# Altium PCB 222.PcbDoc
Units mil, origin at the board's own origin, x right, y up, seen from the top; angles counter-clockwise.
Board outline 1929.13 x 275.59 mil, 2 copper layers (Top Layer, Bottom Layer); 16 components, 17 nets, 48 pads, 24 vias.
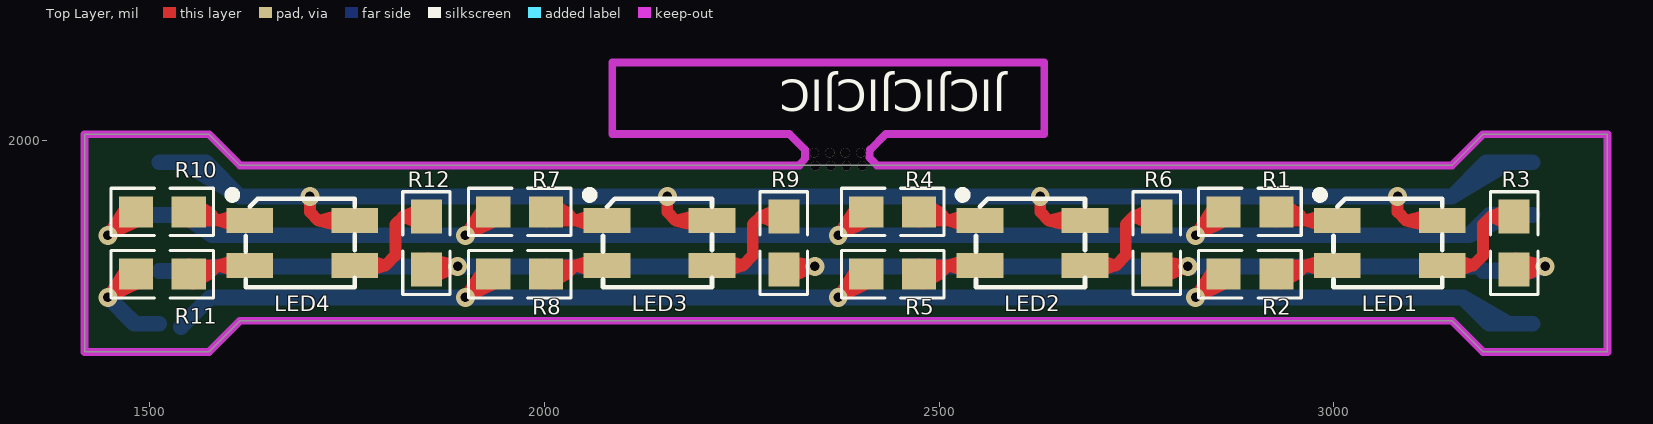
[diagram p0: Top Layer view]
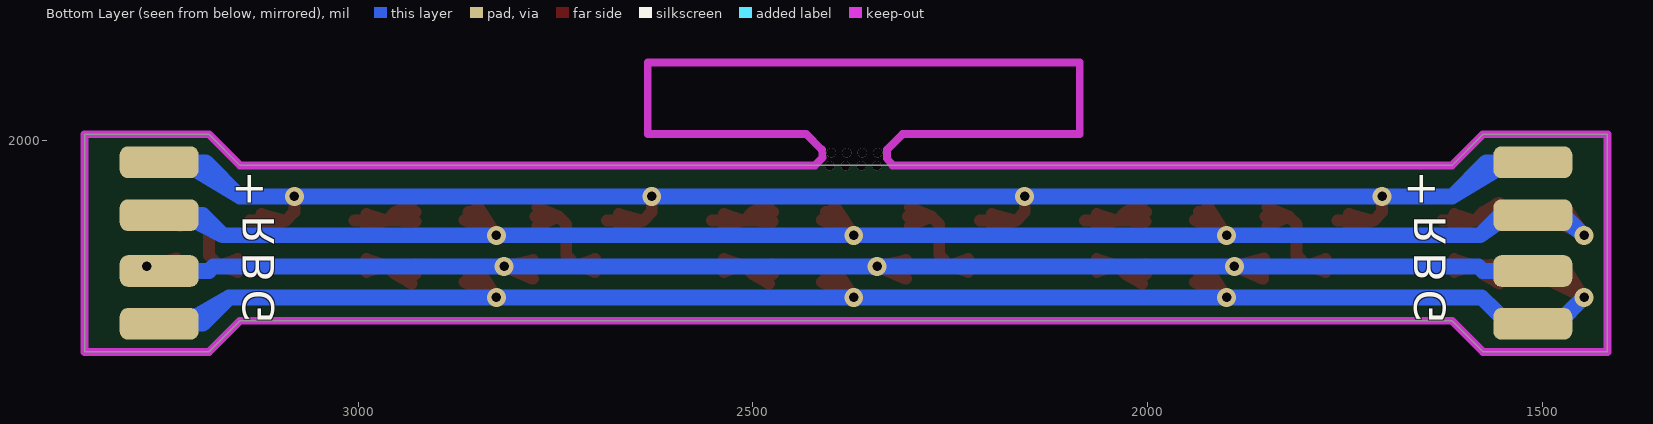
[diagram p1: Bottom Layer view, seen from below]

## Layer stack, top to bottom
Top Layer: signal copper 1.4
Dielectric: dielectric 12.6, FR-4, Dk 4.8
Bottom Layer: signal copper 1.4

## Board outline
1417.32,2007.87 1417.32,1732.28 1574.8,1732.28 1614.17,1771.65 3149.61,1771.65 3188.98,1732.28 3346.46,1732.28 3346.46,2007.87 3188.98,2007.87 3149.61,1968.5 1614.17,1968.5 1574.8,2007.87

## Design rules (kind name [scope] priority, off if disabled: settings)
Clearance [All] p1: gap=10
PolygonConnect [All] p1: connectstyle=Relief reliefconductorwidth=10 reliefentries=4 polygonreliefangle="90 Angle" airgapwidth=10
RoutingVias [All] p1: holewidth=28 width=50 viastyle="Through Hole" minholewidth=28 minwidth=50 maxholewidth=28 maxwidth=50
SolderMaskExpansion [All] p1: expansion=4
Width [All] p1: maxlimit=100 minlimit=10 preferedwidth=10
28 further rules are at their usual default settings.

## Classes and differential pairs
component class 222: LED1 LED2 LED4 R1 R2 R3 R4 R5 R6 R7 R8 R9 R10 R11 R12

## Components (designator, comment, footprint, x,y, rotation, side; value= is the part's Value field where it differs from the comment)
LED1 "RGB-3528" "LED 3528-4Pin" 3070.87,1870.08 r0 top
LED2 "RGB-3528" "LED 3528-4Pin" 2618.11,1870.08 r0 top
LED3 "RGB-3528" "LED 3528-4Pin" 2145.67,1870.08 r0 top
LED4 "RGB-3528" "LED 3528-4Pin" 1692.91,1870.08 r0 top
R1 "Res1" 0603-1 2893.7,1909.45 r180 top
R2 "Res1" 0603-1 2893.7,1830.71 r180 top
R3 "Res1" 0603-1 3228.35,1870.08 r270 top
R4 "Res1" 0603-1 2440.94,1909.45 r180 top
R5 "Res1" 0603-1 2440.94,1830.71 r180 top
R6 "Res1" 0603-1 2775.59,1870.08 r270 top
R7 "Res1" 0603-1 1968.5,1909.45 r180 top
R8 "Res1" 0603-1 1968.5,1830.71 r180 top
R9 "Res1" 0603-1 2303.15,1870.08 r270 top
R10 "Res1" 0603-1 1515.75,1909.45 r180 top
R11 "Res1" 0603-1 1515.75,1830.71 r180 top
R12 "Res1" 0603-1 1850.39,1870.08 r270 top

## Footprints (in the part's own frame and the unit in brackets; to place one, negate y for a bottom-side part, rotate by r counter-clockwise, add the part's x,y. Pads: shape width x height; smd on the part's side, far side on the other; paste and mask are expansions set on the pad)
0603-1 [mm] "贴片带丝印"
  rect 1.1x1 smd: 1(-0.85,0) 2(0.85,0)
  silkscreen extent -1.65,-0.76 1.65,0.76, body extent -1.14,-0.38 1.14,0.38, height 1
"LED 3528-4Pin" [mm] "4脚，3528LED"
  rect 1.5x0.8 smd: 1(-1.689,0.725) 2(-1.689,-0.725) 3(1.689,-0.725) 4(1.689,0.725)
  silkscreen extent -2.37,-1.42 1.69,1.68, body extent -1.75,-1.4 1.75,1.4, height 1.95

## Part data
LED1 LED2 LED3 LED4: library part LED-RGB-3528, "三基色LED"
R1 R2 R3 R4 R5 R6 R7 R8 R9 R10 R11 R12: "贴片电阻"

## Free pads (board coordinates)
  rrect50% 100x40 smd far side: 2(1511.81,1767.72) 2(1511.81,1834.65) 2(1511.81,1905.51) 2(1511.81,1972.44) 2(3251.97,1767.72) 2(3251.97,1834.65) 2(3251.97,1905.51) 2(3251.97,1972.44)

## Via types
v1: diameter 24, hole 12, Top Layer to Bottom Layer, 16 vias
v2: diameter 12, hole 12, Top Layer to Bottom Layer, 8 vias

## Nets (pads, with @x,y where several pads share a name; then routed paths per layer and width w, separated by ;. In a path a pad name is that pad's centre, name@x,y a point inside that pad or via, vN(x,y) a via of type N, cw(c..) or ccw(c..) an arc to the next point about the centre after c; other vN are vias at no path point)
B: pad.2@1511.81,1834.65 pad.2@3251.97,1834.65 R3.2 R6.2 R9.2 R12.2 | length 3790.4
  Top Layer w15: R12.2 v1(1889.76,1840.55) ; R12.2 v1(1889.76,1840.55) ; R12.2 1875.98,1836.61 ; R12.2 1875.98,1836.61 ; R12.2@1853.29,1824.78 v1(1889.76,1840.55) ; R12.2@1853.29,1824.78 v1(1889.76,1840.55) ; R12.2@1853.29,1824.78 1875.98,1836.61 ; R12.2@1853.29,1824.78 1875.98,1836.61 ; R12.2@1853.29,1848.45 v1(1889.76,1840.55) ; R12.2@1853.29,1848.45 v1(1889.76,1840.55) ; R12.2@1853.29,1848.45 1875.98,1836.61 ; R12.2@1853.29,1848.45 1875.98,1836.61 ; 1875.98,1836.61 v1(1889.76,1840.55) ; 1875.98,1836.61 v1(1889.76,1840.55) ; 1875.98,1836.61 v1(1889.76,1840.55) ; 1875.98,1836.61 v1(1889.76,1840.55) ; 1875.98,1836.61 v1(1889.76,1840.55) ; 1875.98,1836.61 v1(1889.76,1840.55) ; 1875.98,1836.61 v1(1889.76,1840.55) ; 1875.98,1836.61 v1@1879.92,1840.55 ; v1@1879.92,1840.55 1850.39,1838.58 v1(1889.76,1840.55) ; v1@1879.92,1840.55 1853.69,1826.85 v1(1889.76,1840.55) ; v1@1879.92,1840.55 1852.1,1850.65 v1(1889.76,1840.55) ; v1@1879.92,1840.55 v1(1889.76,1840.55) ; 2328.74,1836.61 v1(2342.52,1840.55) ; 2328.74,1836.61 v1(2342.52,1840.55) ; 2328.74,1836.61 v1(2342.52,1840.55) ; 2328.74,1836.61 2306.05,1824.78 v1(2342.52,1840.55) ; 2328.74,1836.61 2306.05,1848.45 v1(2342.52,1840.55) ; 2328.74,1836.61 R9.2 v1(2342.52,1840.55) ; 2801.18,1836.61 v1(2814.96,1840.55) ; 2801.18,1836.61 v1(2814.96,1840.55) ; 2801.18,1836.61 v1(2814.96,1840.55) ; 2801.18,1836.61 2778.49,1824.78 v1(2814.96,1840.55) ; 2801.18,1836.61 2778.49,1848.45 v1(2814.96,1840.55) ; 2801.18,1836.61 R6.2 v1(2814.96,1840.55) ; R3.2 v1(3267.72,1840.55) ; R3.2 v1(3267.72,1840.55) ; R3.2 3253.94,1836.61 ; R3.2 3253.94,1836.61 ; R3.2@3231.25,1824.78 v1(3267.72,1840.55) ; R3.2@3231.25,1824.78 v1(3267.72,1840.55) ; R3.2@3231.25,1824.78 3253.94,1836.61 ; R3.2@3231.25,1824.78 3253.94,1836.61 ; R3.2@3231.25,1848.45 v1(3267.72,1840.55) ; R3.2@3231.25,1848.45 v1(3267.72,1840.55) ; R3.2@3231.25,1848.45 3253.94,1836.61 ; R3.2@3231.25,1848.45 3253.94,1836.61 ; 3253.94,1836.61 v1(3267.72,1840.55) ; 3253.94,1836.61 v1(3267.72,1840.55) ; 3253.94,1836.61 v1(3267.72,1840.55) ; 3253.94,1836.61 v1(3267.72,1840.55) ; 3253.94,1836.61 v1(3267.72,1840.55) ; 3253.94,1836.61 v1(3267.72,1840.55) ; 3253.94,1836.61 v1(3267.72,1840.55) ; 3253.94,1836.61 v1@3257.87,1840.55 ; v1@3257.87,1840.55 3228.35,1838.58 v1(3267.72,1840.55) ; v1@3257.87,1840.55 3231.64,1826.85 v1(3267.72,1840.55) ; v1@3257.87,1840.55 3230.06,1850.65 v1(3267.72,1840.55) ; v1@3257.87,1840.55 v1(3267.72,1840.55)
  Bottom Layer w20: pad.2@1511.81,1834.65 1574.8,1834.65 ; pad.2@1541.81,1834.65 1574.8,1834.65 ; 3194.71,1834.65 v1(3267.72,1840.55) 3251.97,1834.65 3188.98,1834.65 ; pad.2@3221.97,1834.65 3188.98,1834.65 ; 1574.8,1834.65 1580.71,1840.55 v1(1889.76,1840.55) v1(2342.52,1840.55) v1(2814.96,1840.55) 3183.07,1840.55 3188.98,1834.65
G: pad.2@1511.81,1767.72 pad.2@3251.97,1767.72 R2.2 R5.2 R8.2 R11.2 | length 2761.5
  Top Layer w15: R11.2@1471.08,1838.66 v1(1446.85,1801.18) ; R11.2@1480.31,1830.71 v1(1446.85,1801.18) ; R11.2 1476.38,1830.71 v1(1446.85,1801.18) ; R11.2@1487.05,1820.56 v1(1446.85,1801.18) ; R8.2@1923.84,1838.66 v1(1899.61,1801.18) ; R8.2@1933.07,1830.71 v1(1899.61,1801.18) ; R8.2 1929.13,1830.71 v1(1899.61,1801.18) ; R8.2@1939.81,1820.56 v1(1899.61,1801.18) ; R5.2@2396.28,1838.66 v1(2372.05,1801.18) ; R5.2@2405.51,1830.71 v1(2372.05,1801.18) ; R5.2 2401.57,1830.71 v1(2372.05,1801.18) ; R5.2@2412.25,1820.56 v1(2372.05,1801.18) ; R2.2@2849.03,1838.66 v1(2824.8,1801.18) ; R2.2@2858.27,1830.71 v1(2824.8,1801.18) ; R2.2 2854.33,1830.71 v1(2824.8,1801.18) ; R2.2@2865.01,1820.56 v1(2824.8,1801.18)
  Bottom Layer w20: pad.2@1481.81,1767.72 v1(1446.85,1801.18) 1480.32,1767.72 pad.2@1511.81,1767.72 ; pad.2@1539.37,1763.78 1576.77,1801.18 ; pad.2@1541.81,1767.72 1576.77,1801.18 ; pad.2@3251.97,1767.72 3196.85,1767.72 ; 1576.77,1801.18 v1(1899.61,1801.18) v1(2372.05,1801.18) v1(2824.8,1801.18) 3163.39,1801.18 ; 3163.39,1801.18 pad.2@3221.97,1767.72 ; 3163.39,1801.18 3196.85,1767.72 ; 3196.85,1767.72 pad.2@3221.97,1767.72 ; 3196.85,1767.72 pad.2@3221.97,1767.72
GND: 
NetLED1_1: LED1.1 R1.1 | length 412.8
  Top Layer w15: R1.1 2952.76,1909.45 ; R1.1@2927.49,1897.37 2963.58,1898.62 ; R1.1@2934.7,1920.29 2963.58,1898.62 ; LED1.1@2989.33,1890.47 2963.58,1898.62 ; LED1.1@2989.33,1906.77 2963.58,1898.62 ; LED1.1@2990.59,1898.62 2963.58,1898.62 ; LED1.1 2963.58,1898.62 ; R1.1@2929.13,1909.45 2952.76,1909.45 ; R1.1@2929.13,1909.45 2952.76,1909.45 ; R1.1@2929.13,1909.45 2963.58,1898.62 ; 2952.76,1909.45 2932.28,1897.68 2952.76,1909.45 ; 2952.76,1909.45 2932.28,1921.22 2952.76,1909.45 ; 2952.76,1909.45 2963.58,1898.62
NetLED1_2: LED1.2 R2.1 | length 412.8
  Top Layer w15: R2.1 2952.76,1830.71 ; R2.1@2927.49,1842.78 2963.58,1841.54 ; R2.1@2934.7,1819.87 2963.58,1841.54 ; LED1.2@2989.33,1833.38 2963.58,1841.54 ; LED1.2@2989.33,1849.69 2963.58,1841.54 ; LED1.2@2990.59,1841.54 2963.58,1841.54 ; LED1.2 2963.58,1841.54 ; R2.1@2929.13,1830.71 2952.76,1830.71 ; R2.1@2929.13,1830.71 2952.76,1830.71 ; R2.1@2929.13,1830.71 2963.58,1841.54 ; 2952.76,1830.71 2932.28,1818.94 2952.76,1830.71 ; 2952.76,1830.71 2932.28,1842.48 2952.76,1830.71 ; 2952.76,1830.71 2963.58,1841.54
NetLED1_3: LED1.3 R3.1 | length 303.4
  Top Layer w15: LED1.3 3176.18,1841.54 ; LED1.3@3151.15,1841.54 3176.18,1841.54 ; LED1.3@3152.5,1833.4 3176.18,1841.54 ; LED1.3@3152.5,1849.67 3176.18,1841.54 ; R3.1@3225.83,1891.62 3198.82,1903.54 ; R3.1@3225.83,1915.47 3198.82,1903.54 ; 3176.18,1841.54 3188.98,1854.33 3188.98,1893.7 3198.82,1903.54 ; 3198.82,1903.54 R3.1 3198.82,1903.54
NetLED2_1: LED2.1 R4.1 | length 412.8
  Top Layer w15: R4.1 2500,1909.45 ; R4.1@2474.74,1897.37 2510.83,1898.62 ; R4.1@2481.94,1920.29 2510.83,1898.62 ; LED2.1@2536.57,1890.47 2510.83,1898.62 ; LED2.1@2536.57,1906.77 2510.83,1898.62 ; LED2.1@2537.83,1898.62 2510.83,1898.62 ; LED2.1 2510.83,1898.62 ; R4.1@2476.38,1909.45 2500,1909.45 ; R4.1@2476.38,1909.45 2500,1909.45 ; R4.1@2476.38,1909.45 2510.83,1898.62 ; 2500,1909.45 2479.52,1897.68 2500,1909.45 ; 2500,1909.45 2479.52,1921.22 2500,1909.45 ; 2500,1909.45 2510.83,1898.62
NetLED2_2: LED2.2 R5.1 | length 412.8
  Top Layer w15: R5.1 2500,1830.71 ; R5.1@2474.74,1842.78 2510.83,1841.54 ; R5.1@2481.94,1819.87 2510.83,1841.54 ; LED2.2@2536.57,1833.38 2510.83,1841.54 ; LED2.2@2536.57,1849.69 2510.83,1841.54 ; LED2.2@2537.83,1841.54 2510.83,1841.54 ; LED2.2 2510.83,1841.54 ; R5.1@2476.38,1830.71 2500,1830.71 ; R5.1@2476.38,1830.71 2500,1830.71 ; R5.1@2476.38,1830.71 2510.83,1841.54 ; 2500,1830.71 2479.52,1818.94 2500,1830.71 ; 2500,1830.71 2479.52,1842.48 2500,1830.71 ; 2500,1830.71 2510.83,1841.54
NetLED2_3: LED2.3 R6.1 | length 303.4
  Top Layer w15: LED2.3 2723.43,1841.54 ; LED2.3@2698.39,1841.54 2723.43,1841.54 ; LED2.3@2699.75,1833.4 2723.43,1841.54 ; LED2.3@2699.75,1849.67 2723.43,1841.54 ; R6.1@2773.08,1891.62 2746.06,1903.54 ; R6.1@2773.08,1915.47 2746.06,1903.54 ; 2723.43,1841.54 2736.22,1854.33 2736.22,1893.7 2746.06,1903.54 ; 2746.06,1903.54 R6.1 2746.06,1903.54
NetLED3_1: LED3.1 R7.1 | length 412.8
  Top Layer w15: R7.1 2027.56,1909.45 ; R7.1@2002.3,1897.37 2038.39,1898.62 ; R7.1@2009.5,1920.29 2038.39,1898.62 ; LED3.1@2064.13,1890.47 2038.39,1898.62 ; LED3.1@2064.13,1906.77 2038.39,1898.62 ; LED3.1@2065.39,1898.62 2038.39,1898.62 ; LED3.1 2038.39,1898.62 ; R7.1@2003.94,1909.45 2027.56,1909.45 ; R7.1@2003.94,1909.45 2027.56,1909.45 ; R7.1@2003.94,1909.45 2038.39,1898.62 ; 2027.56,1909.45 2007.08,1897.68 2027.56,1909.45 ; 2027.56,1909.45 2007.08,1921.22 2027.56,1909.45 ; 2027.56,1909.45 2038.39,1898.62
NetLED3_2: LED3.2 R8.1 | length 412.8
  Top Layer w15: R8.1 2027.56,1830.71 ; R8.1@2002.3,1842.78 2038.39,1841.54 ; R8.1@2009.5,1819.87 2038.39,1841.54 ; LED3.2@2064.13,1833.38 2038.39,1841.54 ; LED3.2@2064.13,1849.69 2038.39,1841.54 ; LED3.2@2065.39,1841.54 2038.39,1841.54 ; LED3.2 2038.39,1841.54 ; R8.1@2003.94,1830.71 2027.56,1830.71 ; R8.1@2003.94,1830.71 2027.56,1830.71 ; R8.1@2003.94,1830.71 2038.39,1841.54 ; 2027.56,1830.71 2007.08,1818.94 2027.56,1830.71 ; 2027.56,1830.71 2007.08,1842.48 2027.56,1830.71 ; 2027.56,1830.71 2038.39,1841.54
NetLED3_3: LED3.3 R9.1 | length 273.9
  Top Layer w15: LED3.3 2250.98,1841.54 ; LED3.3@2225.95,1841.54 2250.98,1841.54 ; LED3.3@2227.31,1833.4 2250.98,1841.54 ; LED3.3@2227.31,1849.67 2250.98,1841.54 ; R9.1@2300.64,1891.62 2273.62,1903.54 ; R9.1@2300.64,1915.47 2273.62,1903.54 ; R9.1 2273.62,1903.54 ; 2250.98,1841.54 2263.78,1854.33 2263.78,1893.7 2273.62,1903.54
NetLED4_1: LED4.1 R10.1 | length 412.8
  Top Layer w15: R10.1 1574.8,1909.45 ; R10.1@1549.54,1897.37 1585.63,1898.62 ; R10.1@1556.74,1920.29 1585.63,1898.62 ; LED4.1@1611.37,1890.47 1585.63,1898.62 ; LED4.1@1611.37,1906.77 1585.63,1898.62 ; LED4.1@1612.63,1898.62 1585.63,1898.62 ; LED4.1 1585.63,1898.62 ; R10.1@1551.18,1909.45 1574.8,1909.45 ; R10.1@1551.18,1909.45 1574.8,1909.45 ; R10.1@1551.18,1909.45 1585.63,1898.62 ; 1574.8,1909.45 1554.32,1897.68 1574.8,1909.45 ; 1574.8,1909.45 1554.32,1921.22 1574.8,1909.45 ; 1574.8,1909.45 1585.63,1898.62
NetLED4_2: LED4.2 R11.1 | length 412.8
  Top Layer w15: R11.1 1574.8,1830.71 ; R11.1@1549.54,1842.78 1585.63,1841.54 ; R11.1@1556.74,1819.87 1585.63,1841.54 ; LED4.2@1611.37,1833.38 1585.63,1841.54 ; LED4.2@1611.37,1849.69 1585.63,1841.54 ; LED4.2@1612.63,1841.54 1585.63,1841.54 ; LED4.2 1585.63,1841.54 ; R11.1@1551.18,1830.71 1574.8,1830.71 ; R11.1@1551.18,1830.71 1585.63,1841.54 ; R11.1@1551.18,1830.71 1574.8,1830.71 ; 1574.8,1830.71 1554.32,1818.94 1574.8,1830.71 ; 1574.8,1830.71 1554.32,1842.48 1574.8,1830.71 ; 1574.8,1830.71 1585.63,1841.54
NetLED4_3: LED4.3 R12.1 | length 273.9
  Top Layer w15: LED4.3 1798.23,1841.54 ; LED4.3@1773.19,1841.54 1798.23,1841.54 ; LED4.3@1774.55,1833.4 1798.23,1841.54 ; LED4.3@1774.55,1849.67 1798.23,1841.54 ; R12.1@1847.88,1891.62 1820.87,1903.54 ; R12.1@1847.88,1915.47 1820.87,1903.54 ; R12.1 1820.87,1903.54 ; 1798.23,1841.54 1811.02,1854.33 1811.02,1893.7 1820.87,1903.54
R: pad.2@1511.81,1905.51 pad.2@3251.97,1905.51 R1.2 R4.2 R7.2 R10.2 | length 2758.4
  Top Layer w15: R10.2@1471.08,1917.4 v1(1446.85,1879.92) ; R10.2@1480.31,1909.45 v1(1446.85,1879.92) ; R10.2 1476.38,1909.45 v1(1446.85,1879.92) ; R10.2@1487.05,1899.3 v1(1446.85,1879.92) ; R7.2@1923.84,1917.4 v1(1899.61,1879.92) ; R7.2@1933.07,1909.45 v1(1899.61,1879.92) ; R7.2 1929.13,1909.45 v1(1899.61,1879.92) ; R7.2@1939.81,1899.3 v1(1899.61,1879.92) ; R4.2@2396.28,1917.4 v1(2372.05,1879.92) ; R4.2@2405.51,1909.45 v1(2372.05,1879.92) ; R4.2 2401.57,1909.45 v1(2372.05,1879.92) ; R4.2@2412.25,1899.3 v1(2372.05,1879.92) ; R1.2@2849.03,1917.4 v1(2824.8,1879.92) ; R1.2@2858.27,1909.45 v1(2824.8,1879.92) ; R1.2 2854.33,1909.45 v1(2824.8,1879.92) ; R1.2@2865.01,1899.3 v1(2824.8,1879.92)
  Bottom Layer w20: pad.2@1481.81,1905.51 v1(1446.85,1879.92) 1472.44,1905.51 1511.81,1905.51 1553.15,1905.51 1578.74,1879.92 ; pad.2@1541.81,1905.51 1578.74,1879.92 ; pad.2@3251.97,1905.51 3196.85,1905.51 ; 1578.74,1879.92 v1(1899.61,1879.92) v1(2372.05,1879.92) v1(2824.8,1879.92) 3171.26,1879.92 ; 3171.26,1879.92 pad.2@3221.97,1905.51 ; 3171.26,1879.92 3196.85,1905.51 ; 3196.85,1905.51 pad.2@3221.97,1905.51 ; 3196.85,1905.51 pad.2@3221.97,1905.51
VCC: LED1.4 LED2.4 LED3.4 LED4.4 pad.2@1511.81,1972.44 pad.2@3251.97,1972.44 | length 2768.8
  Top Layer w15: v1(1702.76,1929.13) 1702.76,1909.45 1713.58,1898.62 ; LED4.4@1744.57,1890.44 1713.58,1898.62 ; LED4.4@1744.57,1906.8 1713.58,1898.62 ; LED4.4@1745.63,1898.62 1713.58,1898.62 ; LED4.4 1713.58,1898.62 ; v1(2155.51,1929.13) 2155.51,1909.45 2166.34,1898.62 ; LED3.4@2197.33,1890.44 2166.34,1898.62 ; LED3.4@2197.33,1906.8 2166.34,1898.62 ; LED3.4@2198.39,1898.62 2166.34,1898.62 ; LED3.4 2166.34,1898.62 ; v1(2627.95,1929.13) 2627.95,1909.45 2638.78,1898.62 ; LED2.4@2669.77,1890.44 2638.78,1898.62 ; LED2.4@2669.77,1906.8 2638.78,1898.62 ; LED2.4@2670.83,1898.62 2638.78,1898.62 ; LED2.4 2638.78,1898.62 ; v1(3080.71,1929.13) 3080.71,1909.45 3091.54,1898.62 ; LED1.4@3122.53,1890.44 3091.54,1898.62 ; LED1.4@3122.53,1906.8 3091.54,1898.62 ; LED1.4@3123.59,1898.62 3091.54,1898.62 ; LED1.4 3091.54,1898.62
  Bottom Layer w20: pad.2@1511.81,1972.44 1570.87,1972.44 ; pad.2@3251.97,1972.44 3192.91,1972.44 ; pad.2@1541.81,1972.44 1570.87,1972.44 ; pad.2@1541.81,1972.44 1614.17,1929.13 ; pad.2@1541.81,1972.44 1570.87,1972.44 ; 1570.87,1972.44 1614.17,1929.13 ; 1614.17,1929.13 v1(1702.76,1929.13) v1(2155.51,1929.13) v1(2627.95,1929.13) v1(3080.71,1929.13) 3149.61,1929.13 ; 3149.61,1929.13 pad.2@3221.97,1972.44 ; 3149.61,1929.13 3192.91,1972.44 ; 3192.91,1972.44 pad.2@3221.97,1972.44 ; 3192.91,1972.44 pad.2@3221.97,1972.44
copper on no net:
  other v2: 2343.15,1968.11 2362.83,1968.11 2382.52,1968.11 2402.2,1968.11 2341.65,1984.49 2361.34,1984.49 2381.02,1984.49 2400.71,1984.49

## Keep-outs
Keep-Out Layer:
  lines w10: 1417.32,1732.28 1417.32,2007.87 1574.8,2007.87 1614.17,1968.5 1998.03,1968.5 2322.83,1968.5 2329.84,1977.28 2329.84,1988.43 2310.16,2008.11 2085.75,2008.11 2085.75,2098.66 2632.99,2098.66 2632.99,2008.11 2432.2,2008.11 2412.52,1988.43 2411.42,1978.35 2421.26,1968.5 2440.94,1968.5 2765.75,1968.5 3149.61,1968.5 3188.98,2007.87 3346.46,2007.87 3346.46,1732.28 3188.98,1732.28 3149.61,1771.65 1614.17,1771.65 1574.8,1732.28 1417.32,1732.28

## Silkscreen, mask and mechanical layers (free items; w line width, h text height)
Top Overlay:
  text "JICJICJICJIC" at 2584.17,2076.76 h40 r180
Bottom Overlay:
  text "+" at 1629.92,1921.26 h40
  text "+" at 3114.17,1921.26 h40
  text "R" at 1622.05,1905.51 h40 r270
  text "R" at 3106.3,1905.51 h40 r270
  text "B" at 1622.05,1858.27 h40 r270
  text "B" at 3106.3,1858.27 h40 r270
  text "G" at 1622.05,1811.02 h40 r270
  text "G" at 3106.3,1811.02 h40 r270